# EAGLE board ReceivingEnd (EAGLE 6.3)
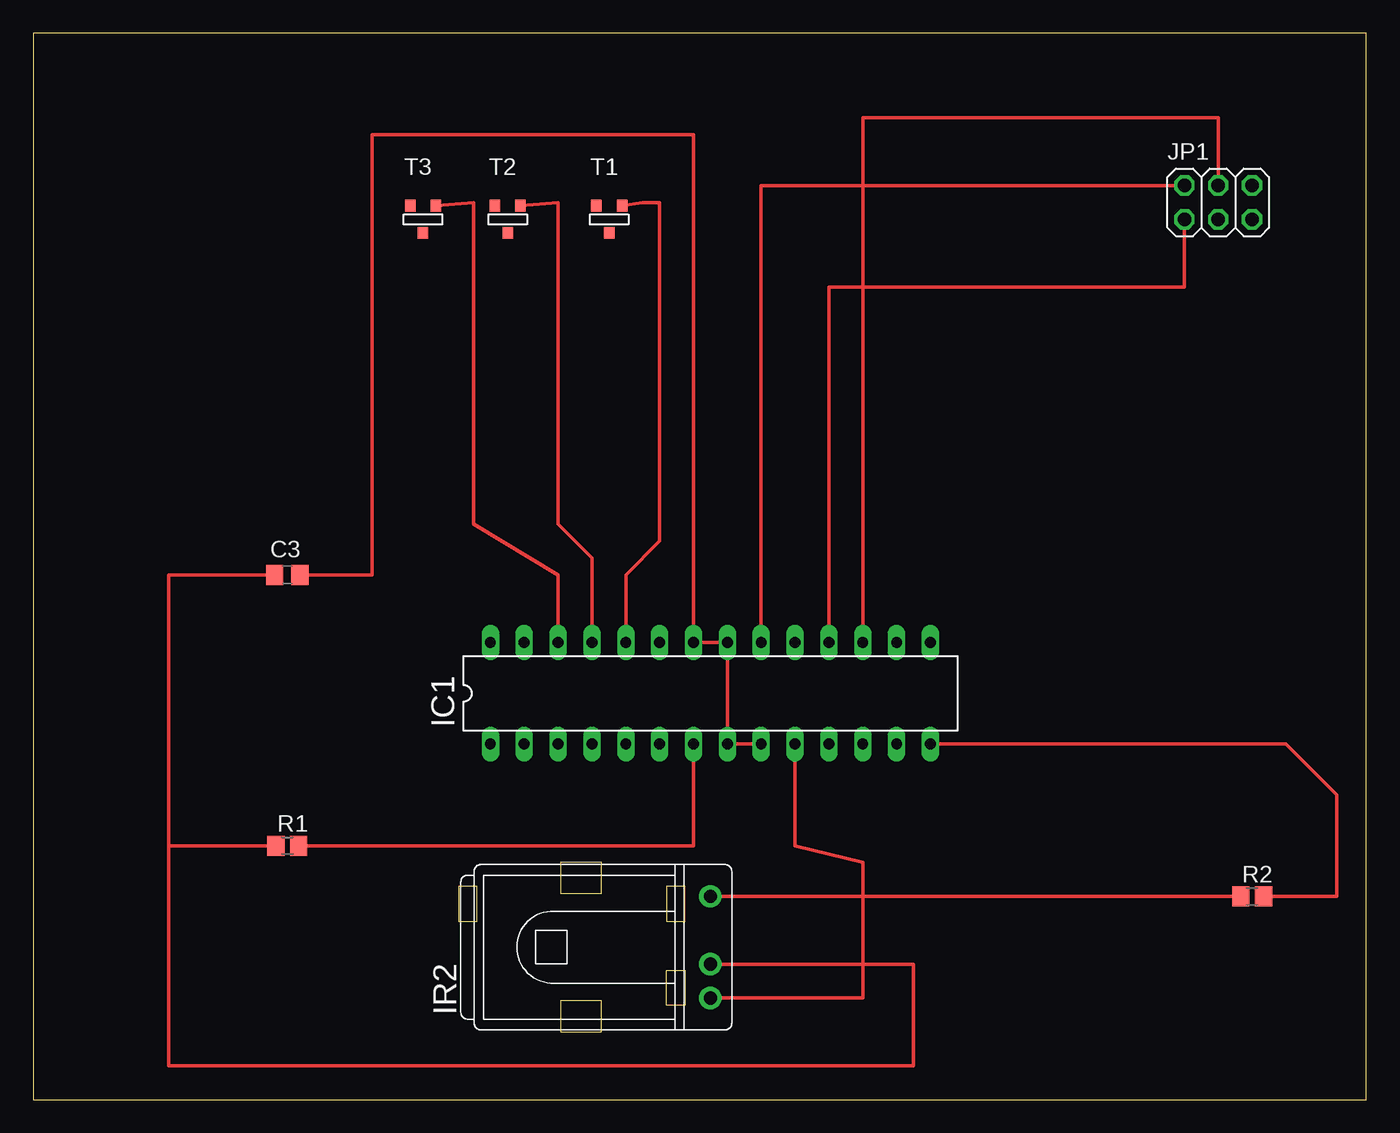
[diagram p0: board, top side]
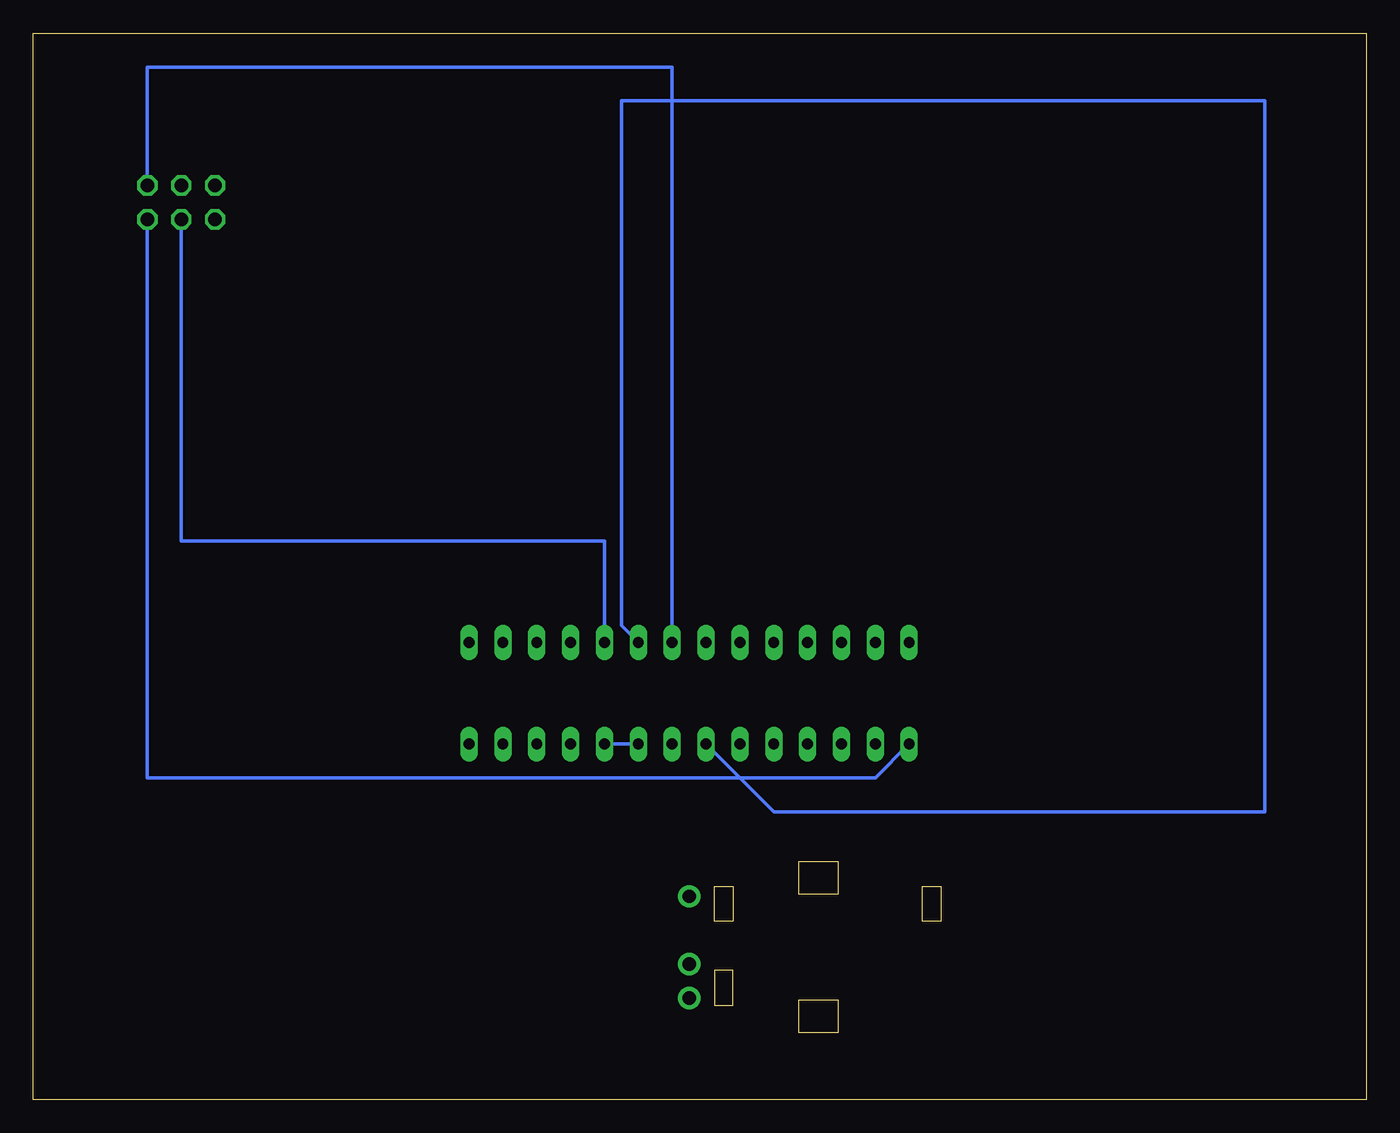
[diagram p1: board, bottom side, seen from below]

Size 100 x 80 mm. Coordinates in mm from the lower left corner, seen from the top.
Outline: 0,0 100,0 100,80 0,80 0,0
Copper layers (1*16): Top 0.035mm / dielectric 1.5mm / Bottom 0.035mm
Design rules "default": minimum track width 10mil, minimum drill 24mil, track to track 8mil, track to pad 8mil, pad to pad 8mil, via to via 8mil, smd to smd 8mil, copper to edge 40mil, drill to drill 8mil, minimum pad ring 10mil, minimum via ring 8mil, stop-mask expansion 4mil, vias tented up to drill 0mil, thermal gap 10mil

## Footprints (pad centres in the part's own frame; a part is rotated, then mirrored left to right if it is on the bottom)
C0805 = smd 1.3 x 1.5: 1 -0.95,0; 2 0.95,0
DIL28-3 = drill 0.813 long: 1 -16.51,-3.81; 2 -13.97,-3.81; 3 -11.43,-3.81; 4 -8.89,-3.81; 5 -6.35,-3.81; 6 -3.81,-3.81; 7 -1.27,-3.81; 8 1.27,-3.81; 9 3.81,-3.81; 10 6.35,-3.81; 11 8.89,-3.81; 12 11.43,-3.81; 13 13.97,-3.81; 14 16.51,-3.81; 15 16.51,3.81; 16 13.97,3.81; 17 11.43,3.81; 18 8.89,3.81; 19 6.35,3.81; 20 3.81,3.81; 21 1.27,3.81; 22 -1.27,3.81; 23 -3.81,3.81; 24 -6.35,3.81; 25 -8.89,3.81; 26 -11.43,3.81; 27 -13.97,3.81; 28 -16.51,3.81
TSOP17_TB1 = drill 1 pad 1.676: GND 0,-3.81; VO 0,3.81; VS 0,-1.27
2X03 = drill 1.016 octagon: 1 -2.54,-1.27; 2 -2.54,1.27; 3 0,-1.27; 4 0,1.27; 5 2.54,-1.27; 6 2.54,1.27
R0805 = smd 1.3 x 1.5: 1 -0.85,0; 2 0.85,0
SOT-23 = smd 0.787 x 0.889: 1 0.025,-1.016; 2 -0.94,1.016; 3 0.991,1.016

## Placement (x,y rotation side)
C3  TBD  [C0805]  19.05,39.37 0 top
IC1  MEGA8-P  [DIL28-3]  50.8,30.48 0 top
IR2  TSOP1756TB1  [TSOP17_TB1]  50.8,11.43 0 top
JP1  [2X03]  88.9,67.31 0 top
R1  TBD  [R0805]  19.05,19.05 0 top
R2  TBD  [R0805]  91.44,15.24 0 top
T1  [SOT-23]  43.18,66.04 0 top
T2  [SOT-23]  35.56,66.04 0 top
T3  [SOT-23]  29.21,66.04 0 top

## Library data of the parts
C3 = rcl
IC1 = atmel; OC_FARNELL: unknown; OC_NEWARK: unknown
IR2 = telefunken; OC_FARNELL: unknown; OC_NEWARK: unknown
JP1 = pinhead
R1 R2 = resistor
T1-T3 = solomon_library; OC_FARNELL: unknown; OC_NEWARK: unknown

## Nets
GND: C3.2 IC1.8 IC1.9 IC1.10 IC1.21 IC1.22 IR2.GND JP1.6
N$1: T2.2
N$2: T3.2
N$3: IC1.11
N$4: IR2.VO R2.1
N$5: T3.1
N$6: T2.1
N$7: T1.1
N$8: T1.2
N$9: IC1.26 T3.3
N$10: IC1.25 T2.3
N$11: IC1.24 T1.3
N$12: C3.1 IR2.VS R1.1
N$15: IC1.23
N$16: IC1.27
N$17: IC1.28
N$18: IC1.2
N$19: IC1.3
N$20: IC1.4
N$21: IC1.5
N$22: IC1.6
N$23: IC1.12
N$24: IC1.13
N$25: IC1.14 R2.2
N$26: IC1.15
N$27: IC1.16
N$28: IC1.17 JP1.4
N$29: IC1.18 JP1.1
N$30: IC1.19 JP1.3
N$35: IC1.1 JP1.5
VCC: IC1.7 IC1.20 JP1.2 R1.2

## Tracks (layer width: path | path; a pad name or v marks a point on that pad's centre or on a via)
GND
  Top 0.254: IC1.9 IC1.8 IC1.21 IC1.22 49.53,72.39 25.4,72.39 25.4,39.37 C3.2 | IR2.GND 62.23,7.62 62.23,17.78 57.15,19.05 IC1.10
  Bottom 0.254: IC1.9 IC1.10 | JP1.6 91.44,77.47 52.07,77.47 IC1.21
N$4
  Top 0.254: IR2.VO R2.1
N$9
  Top 0.254: IC1.26 39.37,39.37 33.02,43.18 33.02,67.31 T3.3
N$10
  Top 0.254: IC1.25 41.91,40.64 39.37,43.18 39.37,67.31 T2.3
N$11
  Top 0.254: IC1.24 44.45,39.37 46.99,41.91 46.99,67.31 45.72,67.31 T1.3
N$12
  Top 0.254: 10.16,19.05 10.16,39.37 C3.1 | IR2.VS 66.04,10.16 66.04,2.54 10.16,2.54 10.16,19.05 | 10.16,19.05 R1.1
N$25
  Top 0.254: R2.2 97.79,15.24 97.79,22.86 93.98,26.67 IC1.14
N$28
  Top 0.254: IC1.17 62.23,73.66 88.9,73.66 JP1.4
N$29
  Top 0.254: IC1.18 59.69,60.96 86.36,60.96 JP1.1
N$30
  Bottom 0.254: JP1.3 88.9,41.91 57.15,41.91 IC1.19
N$35
  Bottom 0.254: IC1.1 36.83,24.13 91.44,24.13 JP1.5
VCC
  Top 0.254: R1.2 49.53,19.05 IC1.7 | JP1.2 54.61,68.58 IC1.20
  Bottom 0.254: IC1.20 55.88,35.56 55.88,74.93 7.62,74.93 7.62,21.59 44.45,21.59 IC1.7